# Altium PCB 1buck.PcbDoc
Units mm, origin at the board's own origin, x right, y up, seen from the top; angles counter-clockwise.
Board outline 152.4 x 101.6 mm, 2 copper layers (Top Layer, Bottom Layer); 18 components, 10 nets, 42 pads, 0 vias.
Unrouted connection lines stored in the file: 23.
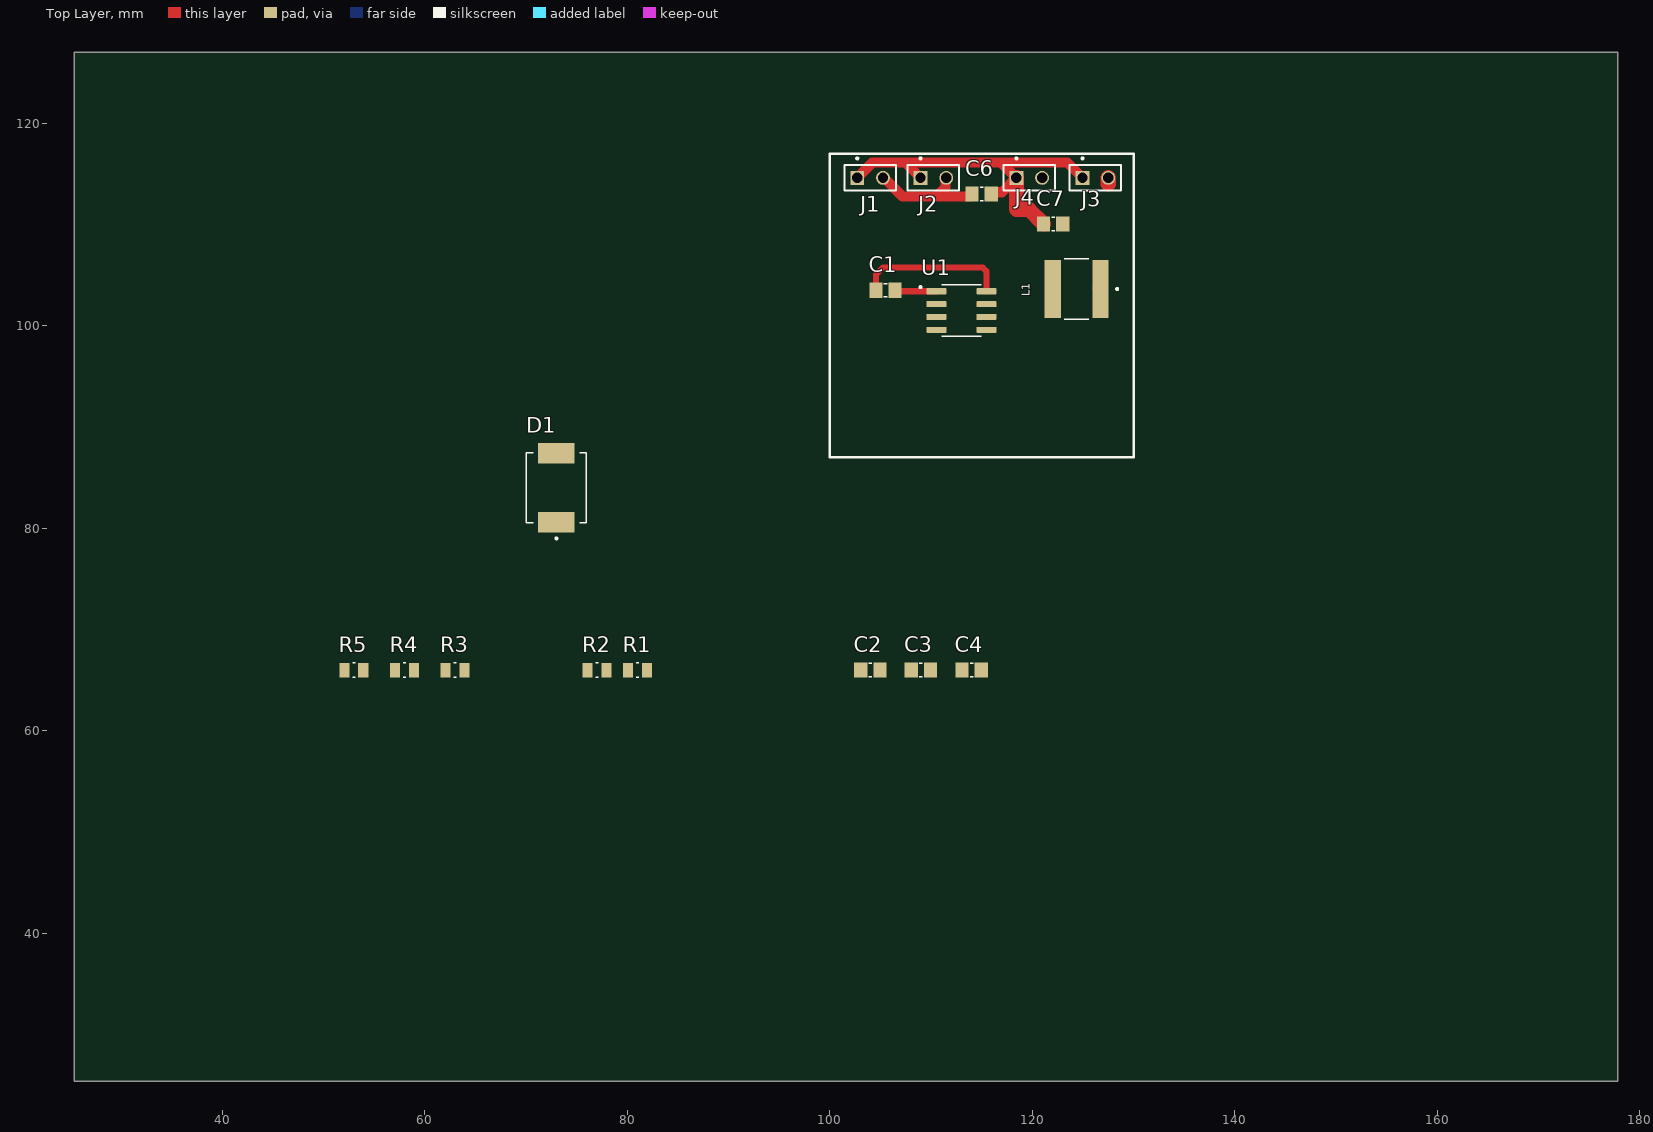
[diagram p0: Top Layer view]
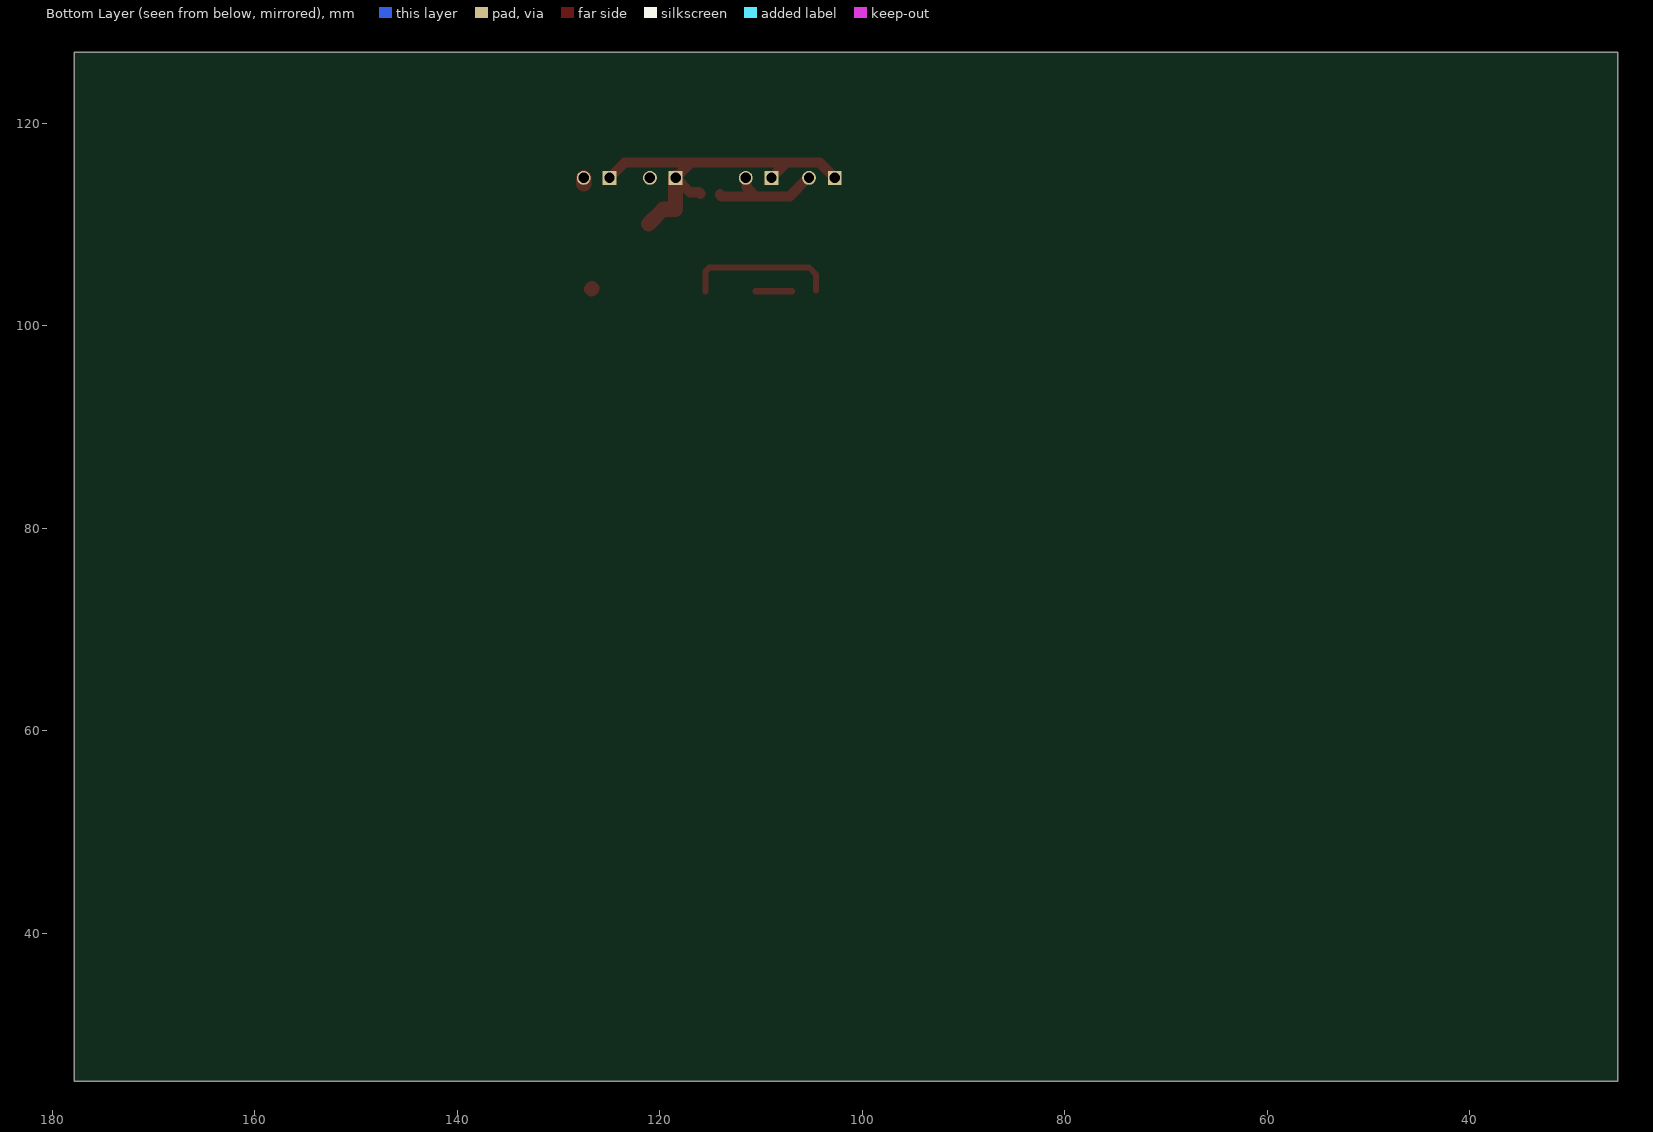
[diagram p1: Bottom Layer view, seen from below]

## Layer stack, top to bottom
Top Solder: solder mask 0.0102, Solder Resist, Dk 3.5
Top Layer: signal copper 0.0356
Dielectric 1: dielectric 0.32, FR-4, Dk 4.8
Bottom Layer: signal copper 0.0356
Bottom Solder: solder mask 0.0102, Solder Resist, Dk 3.5

## Board outline
25.4,25.4 177.8,25.4 177.8,127 25.4,127

## Design rules (kind name [scope] priority, off if disabled: settings)
Clearance [All] p1: gap=0.254 ignorepadtopadclearanceinfootprint=FALSE except(0: Arc-Hole Track-Hole SMDPad-Hole THPad-Hole Via-Hole Fill-Hole Poly-Hole Region-Hole Text-Hole)
PolygonConnect [All] p1: connectstyle=Relief reliefconductorwidth=0.254 reliefentries=4 polygonreliefangle="90 Angle" airgapwidth=0.254
RoutingVias [All] p1: holewidth=0.711 width=1.27 viastyle="Through Hole" minholewidth=0.711 minwidth=1.27 maxholewidth=0.711 maxwidth=1.27
SolderMaskExpansion [All] p1: expansion=0.102 istentingtop=FALSE
Width [All] p1: maxlimit=2 minlimit=0.5 preferedwidth=1.5
30 further rules are at their usual default settings.

## Classes and differential pairs
component class Buck: C1 C2 C3 C4 C6 D1 J1 J2 J3 J4 L1 R1 R2 R3 R4 R5 U1

## Components (designator, comment, footprint, x,y, rotation, side; value= is the part's Value field where it differs from the comment)
C1 "" CAPC2012X135N 105.5,103.5 r180 top
C2 "" CAPC2012X135N 104,66 r0 top
C3 "" CAPC2012X135N 109,66 r0 top
C4 "" CAPC2012X135N 114,66 r0 top
C6 "" CAPC2012X135N 115,113 r180 top
C7 "" CAPC2012X135N 122.05,110.05 r0 top
D1 "SS34" DIO_SS34 73,84 r90 top
J1 "TSW-101-23-S-D-LL" SAMTEC_TSW-101-23-S-D-LL 102.71,114.605 r270 top
J2 "TSW-101-23-S-D-LL" SAMTEC_TSW-101-23-S-D-LL 108.96,114.605 r270 top
J3 "TSW-101-23-S-D-LL" SAMTEC_TSW-101-23-S-D-LL 124.96,114.605 r270 top
J4 "TSW-101-23-S-D-LL" SAMTEC_TSW-101-23-S-D-LL 118.425,114.605 r270 top
L1 "1255AY-100M=P3" IND_1255AY-100M=P3 124.375,103.625 r180 top
R1 "CR0805-FX-2001ELF" RESC2012X60N 81,66 r0 top
R2 "CR0805-FX-2001ELF" RESC2012X60N 77,66 r0 top
R3 "CR0805-FX-2001ELF" RESC2012X60N 63,66 r0 top
R4 "CR0805-FX-2001ELF" RESC2012X60N 58,66 r0 top
R5 "CR0805-FX-2001ELF" RESC2012X60N 53,66 r0 top
U1 "TPS54331DG4" SOIC127P599X175-8N 113,101.5 r0 top

## Footprints (in the part's own frame and the unit in brackets; to place one, negate y for a bottom-side part, rotate by r counter-clockwise, add the part's x,y. Pads: shape width x height; smd on the part's side, far side on the other; paste and mask are expansions set on the pad)
CAPC2012X135N [mm]
  rect 1.3x1.5 smd: 1(-0.95,0) 2(0.95,0)
  silkscreen extent -0.15,-0.65 0.15,0.65, body extent -1,-0.63 1,0.63, height 0.72
DIO_SS34 [mm]
  rect 2x3.6 smd: A(3.4,0) C(-3.4,0)
  silkscreen extent -5.1,-2.95 3.44,2.95, body extent -3.98,-2.95 3.98,2.95, height 2.65
IND_1255AY-100M=P3 [mm]
  rect 1.6x5.7 smd: 1(-2.35,0) 2(2.35,0)
  silkscreen extent -4.1,-3 1.2,3
RESC2012X60N [mm]
  rect 1x1.42 smd: 1(-0.935,0) 2(0.935,0)
  silkscreen extent -0.12,-0.7 0.12,0.7
SAMTEC_TSW-101-23-S-D-LL [mm]
  rect 1.37x1.37 hole 1.02: 01(0,0)
  round 1.37 hole 1.02: 02(0,2.54)
  silkscreen extent -2.02,-1.27 1.27,3.81
SOIC127P599X175-8N [mm]
  rrect25% 1.97x0.6 smd: 1(-2.47,1.905) 2(-2.47,0.635) 3(-2.47,-0.635) 4(-2.47,-1.905) 5(2.47,-1.905) 6(2.47,-0.635) 7(2.47,0.635) 8(2.47,1.905)
  silkscreen extent -4.14,-2.52 1.95,2.52, body extent -3,-2.45 3,2.45, height 1.75

## Part data
C1 C2 C3 C4 C6 C7: library part GRM21BR61E226ME44K, "SMD Capacitor X5R(EIA) with Capacitance: 22uF Tol. 20%. Rated Voltage: 25Vdc", Package="0805 Murata", Availability=Unavailable, MF="Murata Electronics", MP=GRM21BR61E226ME44K, Price=None, SnapEDA_Link=https://www.snapeda.com/parts/GRM21BR61E226ME44K/Murata%20Electronics%20North%20America/view-part/1836557/?ref=snap
D1: "3A, 40V, Schottky Rectifier", Package="DO-214AB-2 Taiwan Semiconductor", Check_prices=https://www.snapeda.com/parts/SS34/Taiwan+Semiconductor/view-part/?ref=eda, MF="Taiwan Semiconductor", MP=SS34, SnapEDA_Link=https://www.snapeda.com/parts/SS34/Taiwan+Semiconductor/view-part/?ref=snap
J1 J2 J3 J4: Package=None, Availability=Unavailable, MP=TSW-101-23-S-D-LL, Price=None
L1: "Inductor with Inductance: 10uH Tol. +/-20%, Package: 2424 _6060_", Package=NONSTANDARD, Digi-Key_Part_Number=490-10800-1-ND, Digi-Key_Purchase_URL=https://www.digikey.com/product-detail/en/murata-electronics/1255AY-100M=P3/490-10800-1-ND/5271542?utm_source=snapeda&utm_medium=aggregator&utm_campaign=symbol, MF=Murata, MP=1255AY-100M=P3, SnapEDA_Link=https://www.snapeda.com/parts/1255AY-100M=P3/Murata/view-part/583912/?ref=snap
R1 R2 R3 R4 R5: "Res Thick Film 0805 2K Ohm 1% 1/8W Â±100ppm/Â°C Molded SMD SMD Paper Tape on Plastic Reel", Package=None, Availability=Unavailable, MP=CR0805-FX-2001ELF, Price=None
U1: "3.5V to 28V Input, 3A, 570kHz Step-Down Converter with Eco-mode 8-SOIC -40 to 150", Package="SOIC-8 Texas Instruments", Check_prices=https://www.snapeda.com/parts/TPS54331DG4/Texas+Instruments/view-part/?ref=eda, MF="Texas Instruments", MP=TPS54331DG4, SnapEDA_Link=https://www.snapeda.com/parts/TPS54331DG4/Texas+Instruments/view-part/?ref=snap

## Nets (pads, with @x,y where several pads share a name; then routed paths per layer and width w, separated by ;. In a path a pad name is that pad's centre, name@x,y a point inside that pad or via, vN(x,y) a via of type N, cw(c..) or ccw(c..) an arc to the next point about the centre after c; other vN are vias at no path point)
GND: C2.2 C3.2 C4.2 C6.1 C7.1 D1.A J1.01 J2.01 J3.01 J4.01 R2.1 R4.1 U1.7 | length 37.1
  Top Layer w1: J1.01 104.149,116.044 ; 104.149,116.119 116.986,116.119 ; 107.521,116.044 J2.01 ; C6.1 115.95,113.029 116.1,113.179 116.999,113.179 J4.01 116.986,116.044 ; 116.986,116.109 123.456,116.109 J3.01
  Top Layer w1.5: J4.01 118.425,111.5 119.65,111.5 C7.1
NetC1_1: C1.1 U1.1 | length 3.6
  Top Layer w0.6: C1.1@106.95,103.405 U1.1
NetC1_2: C1.2 D1.C L1.2 U1.8 | length 14.9
  Top Layer w0.6: C1.2 104.55,105.05 105.25,105.75 115.119,105.75 115.47,105.399 U1.8
NetC2_1: C2.1 U1.4
NetC3_1: C3.1 R5.2
NetC4_1: C4.1 R5.1 U1.6
NetC7_2: C7.2 J3.02 J4.02 L1.1 R1.2 | length 0.7
  Top Layer w1.5: L1.1@126.675,103.675 L1.1 ; J3.02@127.5,114 J3.02
NetR1_1: R1.1 R2.2 U1.5
NetR3_2: R3.2 R4.2 U1.3
VCC: C6.2 J1.02 J2.02 R3.1 U1.2 | length 11.9
  Top Layer w1: J1.02 105.35,114.605 107.205,112.75 110.75,112.75 ; J2.02 111.429,114.534 111.429,113.679 110.75,113 110.75,112.75 ; C6.2 114.05,112.9 113.9,112.75 110.75,112.75

## Silkscreen, mask and mechanical layers (free items; w line width, h text height)
Top Overlay:
  lines w0.254: 100,87 130,87 130,117 100,117 100,87